# Altium PCB PCB3.PcbDoc
Units mil, origin at the board's own origin, x right, y up, seen from the top; angles counter-clockwise.
Board outline 5985.03 x 3125.03 mil, 2 copper layers (Top Layer, Bottom Layer); 86 components, 57 nets, 223 pads, 13 vias.
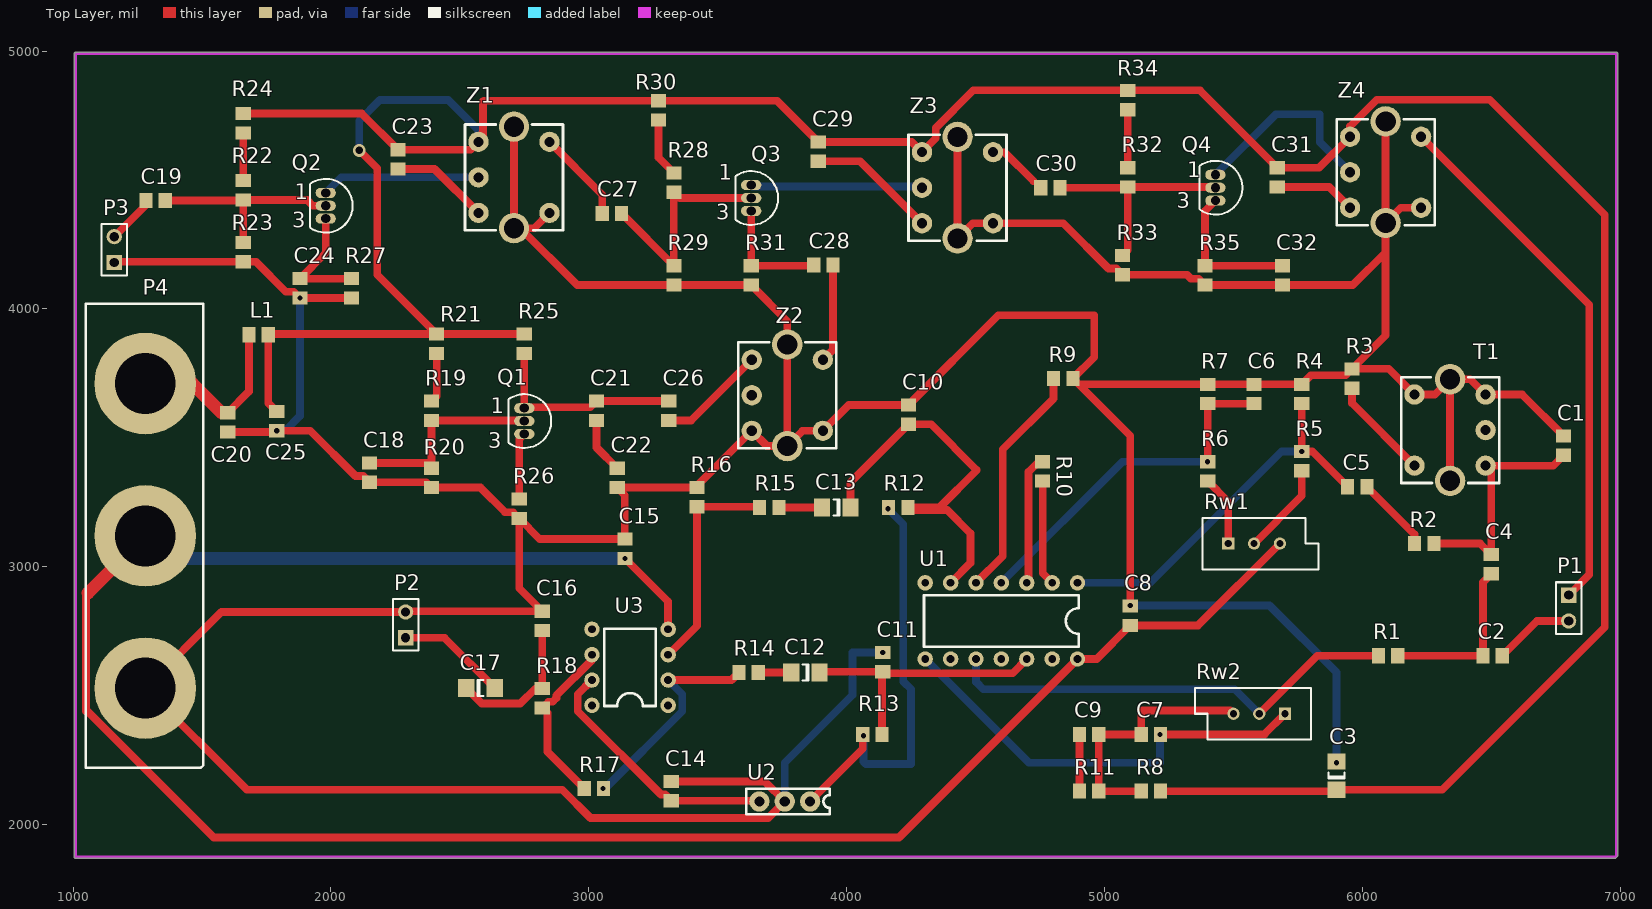
[diagram p0: Top Layer view]
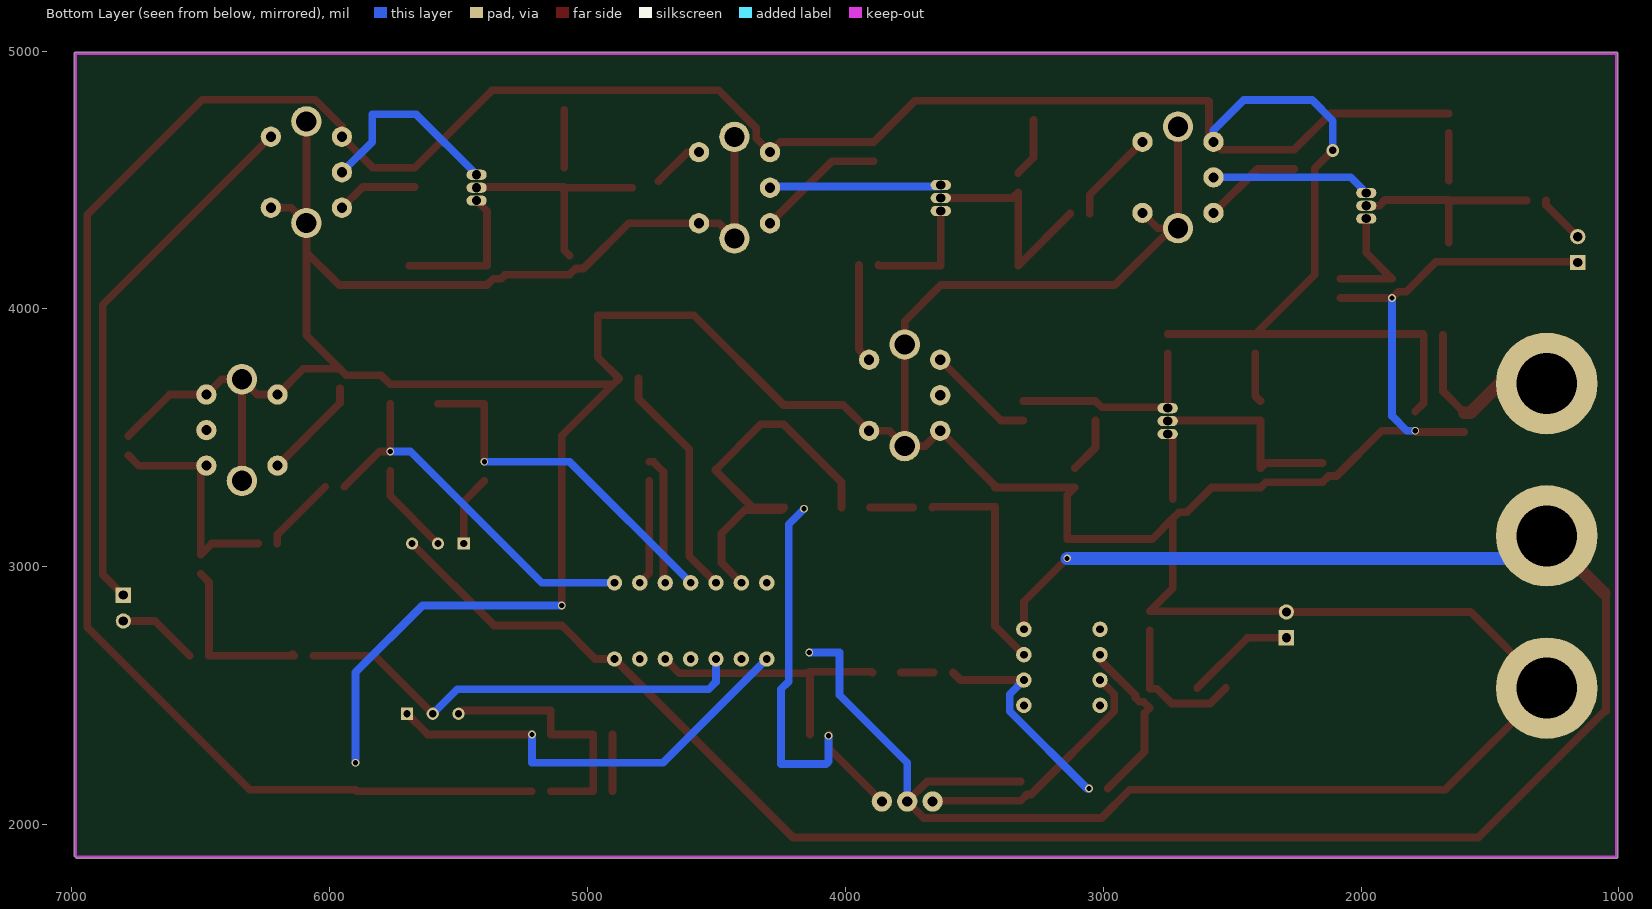
[diagram p1: Bottom Layer view, seen from below]

## Layer stack, top to bottom
Top Layer: signal copper 1.4
Dielectric: dielectric 12.6, FR-4, Dk 4.8
Bottom Layer: signal copper 1.4

## Board outline
1010,1869.98 cw(c1010,1875) 1004.99,1875 1004.99,4990 cw(c1010,4990) 1010,4995.02 6985,4995.02 cw(c6985,4990) 6990.02,4990 6990.02,1880 cw(c6985,1880) 6988.53,1876.44 6988.55,1876.45 6983.55,1871.45 6983.56,1871.47 cw(c6980,1875) 6980,1869.98

## Design rules (kind name [scope] priority, off if disabled: settings)
Clearance [All] p1: gap=10
HoleSize [All] p1: absolutevalues=TRUE maxlimit=1000 minlimit=1 maxpercent=80.000 minpercent=20.000
HoleToHoleClearance [All] p1: gap=1 allowstackedmicrovias=TRUE
MinimumSolderMaskSliver [All] p1: minsoldermaskwidth=1
PolygonConnect [All] p1: connectstyle=Relief reliefconductorwidth=10 reliefentries=4 polygonreliefangle="90 Angle"
RoutingVias [All] p1: holewidth=28 width=50 viastyle="Through Hole" minholewidth=28 minwidth=50 maxholewidth=28 maxwidth=50
SilkscreenOverComponentPads [All] p1: minsilkscreentomaskgap=10
SolderMaskExpansion [All] p1: expansion=4
TestPointUsage [All] p1: valid=0 allowmultiple=FALSE
Testpoint [All] p1: side=15 testpointundercomponent=TRUE minsize=40 maxsize=100 preferedsize=60 minholesize=0 maxholesize=40 preferedholesize=32 testpointgrid=1 style=1023 order=0-112345678
Width [All] p1: maxlimit=100 minlimit=10 preferedwidth=10 toplayer_prefwidth=50 bottomlayer_prefwidth=50 minimp=50.000000 maximp=50.000000 favimp=50.000000
20 further rules are at their usual default settings.

## Classes and differential pairs
component class Sheet1: C1 C2 C3 C4 C5 C6 C7 C8 C9 C10 C11 C12 C13 C14 C15 C16 C17 P1 P2 R1 R2 R3 R4 R5 R6 R7 R8 R9 R10 R11 R12 R13 R14 R15 R16 R17 R18 Rw1 Rw2 T1 U1 U2 U3
component class Sheet2: C18 C19 C20 C21 C22 C23 C24 C25 C26 C27 C28 C29 C30 C31 C32 L1 P3 P4 Q1 Q2 Q3 Q4 R19 R20 R21 R22 R23 R24 R25 R26 R27 R28 R29 R30 R31 R32 R33 R34 R35 Z1 Z2 Z3 Z4

## Components (designator, comment, footprint, x,y, rotation, side; value= is the part's Value field where it differs from the comment)
C1 "Cap" 2012[0805] 6780,3470 r270 top
C2 "Cap" 2012[0805] 6505,2655 r180 top
C3 "Cap Pol1" C1206 5900,2190 r90 top
C4 "Cap" 2012[0805] 6500,3010 r270 top
C5 "Cap" 2012[0805] 5980,3310 r180 top
C6 "Cap" 2012[0805] 5580,3670 r270 top
C7 "Cap" 2012[0805] 5180,2350 r180 top
C8 "Cap" 2012[0805] 5100,2810 r270 top
C9 "Cap" 2012[0805] 4940,2350 r180 top
C10 "Cap" 2012[0805] 4240,3590 r270 top
C11 "Cap" 2012[0805] 4140,2630 r270 top
C12 "Cap Pol1" C1206 3840,2590 r180 top
C13 "Cap Pol1" C1206 3960,3230 r180 top
C14 "Cap" 2012[0805] 3320,2130 r270 top
C15 "Cap" 2012[0805] 3140,3070 r270 top
C16 "Cap" 2012[0805] 2820,2790 r270 top
C17 "Cap Pol1" C1206 2580,2530 r0 top
C18 "Cap" 2012[0805] 2150,3365 r270 top
C19 "Cap" 2012[0805] 1320,4420 r0 top
C20 "Cap" 2012[0805] 1600,3560 r90 top
C21 "Cap" 2012[0805] 3030,3605 r270 top
C22 "Cap" 2012[0805] 3110,3345 r270 top
C23 "Cap" 2012[0805] 2260,4580 r270 top
C24 "Cap" 2012[0805] 1880,4080 r90 top
C25 "Cap" 2012[0805] 1790,3565 r90 top
C26 "Cap" 2012[0805] 3310,3605 r90 top
C27 "Cap" 2012[0805] 3090,4370 r0 top
C28 "Cap" 2012[0805] 3910,4170 r0 top
C29 "Cap" 2012[0805] 3890,4610 r270 top
C30 "Cap" 2012[0805] 4790,4470 r0 top
C31 "Cap" 2012[0805] 5670,4510 r270 top
C32 "Cap" 2012[0805] 5690,4130 r90 top
L1 "Inductor" 2012[0805] 1720,3900 r0 top
P1 "Header 2" HDR1X2 6800,2890 r270 top
P2 "Header 2" HDR1X2 2290,2725 r90 top
P3 "Header 2" HDR1X2 1160,4180 r90 top
P4 "Header 3" shuru 1280,3120 r90 top
Q1 "NPN" TO-226 2750,3565 r180 top
Q2 "NPN" TO-226 1980,4400 r180 top
Q3 "NPN" TO-226 3630,4430 r180 top
Q4 "NPN" TO-226 5430,4470 r180 top
R1 "Res1" 2012[0805] 6100,2655 r180 top
R2 "Res1" 2012[0805] 6240,3090 r180 top
R3 "Res1" 2012[0805] 5960,3730 r270 top
R4 "Res1" 2012[0805] 5765,3670 r270 top
R5 "Res1" 2012[0805] 5765,3410 r270 top
R6 "Res1" 2012[0805] 5400,3370 r270 top
R7 "Res1" 2012[0805] 5400,3670 r270 top
R8 "Res1" 2012[0805] 5180,2130 r180 top
R9 "Res1" 2012[0805] 4840,3730 r180 top
R10 "Res1" 2012[0805] 4760,3370 r270 top
R11 "Res1" 2012[0805] 4940,2130 r180 top
R12 "Res1" 2012[0805] 4200,3230 r180 top
R13 "Res1" 2012[0805] 4100,2350 r180 top
R14 "Res1" 2012[0805] 3620,2590 r180 top
R15 "Res1" 2012[0805] 3700,3230 r180 top
R16 "Res1" 2012[0805] 3420,3270 r270 top
R17 "Res1" 2012[0805] 3020,2140 r180 top
R18 "Res1" 2012[0805] 2820,2490 r270 top
R19 "Res1" 2012[0805] 2390,3605 r90 top
R20 "Res1" 2012[0805] 2390,3345 r90 top
R21 "Res Adj1" 2012[0805] 2410,3865 r270 top
R22 "Res1" 2012[0805] 1660,4460 r90 top
R23 "Res1" 2012[0805] 1660,4220 r90 top
R24 "Res Adj1" 2012[0805] 1660,4720 r270 top
R25 "Res1" 2012[0805] 2750,3865 r90 top
R26 "Res1" 2012[0805] 2730,3225 r90 top
R27 "Res1" 2012[0805] 2080,4080 r90 top
R28 "Res1" 2012[0805] 3330,4490 r90 top
R29 "Res1" 2012[0805] 3330,4130 r90 top
R30 "Res Adj1" 2012[0805] 3270,4770 r270 top
R31 "Res1" 2012[0805] 3630,4130 r90 top
R32 "Res1" 2012[0805] 5090,4510 r90 top
R33 "Res1" 2012[0805] 5070,4170 r90 top
R34 "Res Adj1" 2012[0805] 5090,4810 r270 top
R35 "Res1" 2012[0805] 5390,4130 r90 top
Rw1 "RPot" VR5 5580,3090 r0 top
Rw2 "RPot" VR5 5600,2430 r180 top
T1 "zhongzhou" ZHONGZHOU 6340,3530 r180 top
U1 "MC1496" MC1496 4600,2790 r180 top
U2 "LM7808" LM7808 3760,2090 r180 top
U3 "LM741" LM741 3160,2610 r180 top
Z1 "zhongzhou1" ZHONGZHOU 2710,4510 r0 top
Z2 "zhongzhou2" ZHONGZHOU 3770,3665 r0 top
Z3 "zhongzhou3" ZHONGZHOU 4430,4470 r0 top
Z4 "zhongzhou4" ZHONGZHOU 6090,4530 r0 top

## Footprints (in the part's own frame and the unit in brackets; to place one, negate y for a bottom-side part, rotate by r counter-clockwise, add the part's x,y. Pads: shape width x height; smd on the part's side, far side on the other; paste and mask are expansions set on the pad)
2012[0805] [mm] "Chip Resistor; Body 2.0 x 1.3 mm (LxW typ)"
  rect 1.3x1.5 smd: 1(-0.95,0) 2(0.95,0)
C1206 [mm] "Chip Capacitor; Body 3.2 x 1.6 mm (LxW typ)"
  rect 1.6x1.8 smd: 1(-1.4,0) 2(1.4,0)
  silkscreen extent -0.3,-0.8 0.3,0.8
HDR1X2 [mm] "Connector; Header; 2 Position"
  rect 1.5x1.5 hole 0.9: 1(0,0)
  round 1.5 hole 0.9: 2(2.54,0)
  silkscreen extent -1.27,-1.27 3.81,1.27
LM741 [mil]
  round 60 hole 30: 1(-147.64,147.64) 2(-147.64,49.21) 3(-147.64,-49.21) 4(-147.64,-147.64) 5(147.64,-147.64) 6(147.64,-49.21) 7(147.64,49.21) 8(147.64,147.64)
  silkscreen extent -100,-150 100,150
LM7808 [mm]
  round 2 hole 1: 1(-2.5,0) 2(0,0) 3(2.5,0)
  silkscreen extent -4.44,-1.27 3.81,1.27
MC1496 [mil]
  round 60 hole 30: 1(-295.28,-147.64) 2(-196.85,-147.64) 3(-98.43,-147.64) 4(0,-147.64) 5(98.43,-147.64) 6(196.85,-147.64) 7(295.28,-147.64) 8(295.28,147.64) 9(196.85,147.64) 10(98.43,147.64) 11(0,147.64) 12(-98.43,147.64) 13(-196.85,147.64) 14(-295.28,147.64)
  silkscreen extent -300,-100 300,100
shuru [mm]
  round 10 hole 6: 1(-15,0) 2(0,0) 3(15,0)
  silkscreen extent -22.86,-5.72 22.86,5.84
TO-226 [mm] "TO, Flat Index; 3 In-Line, Axial Leads; Body Dia. 4.8mm; Leads 0.55 x 0.51 mm (max)"
  oval 2x1 hole 0.9: 1(0,-1.27) 2(0,0) 3(0,1.27)
  silkscreen extent -2.65,-2.65 1.55,2.65
VR5 [mm] "Potentiometer; 3 Leads"
  rect 1.2x1.2 hole 0.7: 1(-2.54,0)
  round 1.2 hole 0.7: 2(0,0) 3(2.54,0)
  silkscreen extent -5.08,-2.54 6.35,2.54
ZHONGZHOU [mm]
  round 2 hole 1: 1(-3.5,3.5) 2(-3.5,0) 3(-3.5,-3.5) 4(3.5,-3.5) 5(3.5,3.5)
  round 3 hole 2: 6(0,5) 7(0,-5)
  silkscreen extent -4.83,-5.21 4.83,5.21

## Part data
C1 C2 C4 C5 C6 C7 C8 C9 C10 C11 C14 C15 C16 C18 C19 C20 C21 C22 C23 C24 C25 C26 C27 C28 C29 C30 C31 C32: "Capacitor"
C3 C12 C13 C17: "Polarized Capacitor (Radial)"
P1 P2 P3: "Header, 2-Pin"
P4: "Header, 3-Pin"
Q1 Q2 Q3 Q4: "NPN Bipolar Transistor"
R1 R2 R3 R4 R5 R6 R7 R8 R9 R10 R11 R12 R13 R14 R15 R16 R17 R18 R19 R20 R22 R23 R25 R26 R27 R28 R29 R31 R32 R33 R35: "Resistor"
R21 R24 R30 R34: "Variable Resistor"
Rw1 Rw2: "Potentiometer"
Z2: library part zhongzhou4
Z3: library part zhongzhou2
Z4: library part zhongzhou3

## Via types
v1: diameter 30, hole 20, Top Layer to Bottom Layer, 12 vias
v2: diameter 50, hole 28, Top Layer to Bottom Layer, 1 vias

## Nets (pads, with @x,y where several pads share a name; then routed paths per layer and width w, separated by ;. In a path a pad name is that pad's centre, name@x,y a point inside that pad or via, vN(x,y) a via of type N, cw(c..) or ccw(c..) an arc to the next point about the centre after c; other vN are vias at no path point)
+12V: C3.1 C23.1 C25.2 C29.1 C31.1 L1.2 R8.1 R21.1 R24.1 R25.2 R30.1 R34.1 Z1.1 Z3.1 Z4.1 | length 12576.5
  Top Layer w30: R24.1 2120,4757.4 C23.1 2541.81,4617.4 Z1.1 2590,4665.59 2590,4805 2592.4,4807.4 3730,4807.4 C29.1 4252.6,4647.4 Z3.1 4345.94,4661.54 4345.94,4701.67 4491.68,4847.4 R34.1 5370,4847.4 C31.1 5831.81,4547.4 Z4.1 5952.2,4707.93 6055.18,4810.91 6494.09,4810.91 6940,4365 6940,2765 6309.88,2134.88 C3.1 5895.12,2130 R8.1 ; C25.2 1757.4,3635 L1.2 1759.8,3902.4 R21.1 ; v2(2110,4615) 2180,4545 2180,4132.4 R21.1 ; R25.2 R21.1
  Bottom Layer w30: v2(2110,4615) 2110,4730 2190,4810 2455,4810 2572.2,4692.8 Z1.1
-8V: C8.2 C15.2 P4.2 Rw1.3 U1.14 U3.4 | length 8310.9
  Top Layer w30: 1050,2439.41 1050,2900 ; 1058.15,2437.55 1545.7,1950 4202.91,1950 U1.14 4969.76,2642.36 C8.2 5362.6,2772.6 Rw1.3 ; v1(3140,3032.6) 3307.64,2864.96 U3.4
  Top Layer w50: 1058.15,2898.15 P4.2
  Bottom Layer w30: P4.2 P4.2@1367.4,3032.6
  Bottom Layer w50: P4.2@1367.4,3032.6 v1(3140,3032.6)
GND: C1.1 C3.2 C6.1 C8.1 C10.1 C11.1 C14.1 C15.1 C16.1 C18.2 C20.1 C22.2 C24.1 C25.1 C32.1 P2.2 P3.1 P4.1 R3.1 R4.1 R7.1 R9.1 R16.1 R20.1 R23.1 R26.1 R27.1 R29.1 R31.1 R33.1 R35.1 T1.3 T1.4 T1.6 T1.7 U2.2 Z1.4 Z1.6 Z1.7 Z2.3 Z2.4 Z2.6 Z2.7 Z3.4 Z3.6 Z3.7 Z4.4 Z4.6 Z4.7 | length 22308
  Top Layer w30: P3.1 1162.6,4182.6 R23.1 1709.69,4182.6 1825.47,4066.81 1855.79,4066.81 v1(1880,4042.6) R27.1 ; C20.1 1785,3522.6 v1(1790,3527.6) 1919.69,3527.6 2095.47,3351.81 2125.79,3351.81 C18.2 2370,3327.6 R20.1 2579.69,3307.6 2675.47,3211.81 2705.79,3211.81 R26.1 ; Z1.6 Z1.7 Z1.7@2735,4313.15 ; Z1.4 2788.74,4313.15 Z1.7@2735,4313.15 ; C14.1 3682.6,2167.4 U2.2 3695.63,2025.63 3006.49,2025.63 2897.12,2135 1674.45,2135 P4.1 1575.55,2825 P2.2 2292.4,2827.4 C16.1 2730,2917.4 R26.1 ; Z3.6 Z3.7 4489.05,4332.2 Z3.4 4840.08,4332.2 5015.47,4156.81 5045.79,4156.81 R33.1 5319.69,4132.6 5335.47,4116.81 5365.79,4116.81 R35.1 C32.1 5962.6,4092.6 6090,4220 ; C8.1 5100,3507.4 R9.1@4900,3707.4 ; Z4.6 Z4.7 ; Z4.4 6149.05,4392.2 Z4.7 ; T1.6 T1.7 ; C1.1 6619.61,3667.8 T1.3 6418.74,3726.85 T1.7 ; R26.1 2810.2,3107.4 C15.1 3140,3277.6 3110.2,3307.4 R16.1 3420,3315 Z2.3 3691.26,3468.15 Z2.7 ; Z1.7@2735,4313.15 2955.55,4092.6 R29.1 R31.1 3770,3952.6 Z2.6 Z2.7 ; Z2.7 3829.05,3527.2 Z2.4 4007.99,3627.4 C10.1 4587.6,3975 4960,3975 4960,3812.6 R9.1 R9.1@4900,3707.4 ; R9.1@4900,3707.4 R7.1 C6.1 R4.1 5800.79,3743.19 5935.79,3743.19 R3.1 ; R3.1 6090,3897.4 6090,4220 ; R3.1 6102.6,3767.4 T1.4 6280.95,3667.8 T1.7 ; 6090,4220 Z4.7
  Bottom Layer w30: v1(1790,3527.6) 1822.6,3527.6 1880,3585 v1(1880,4042.6) ; U2.2 3760,2240 4022.4,2502.4 4022.4,2667.4 v1(4140,2667.4) ; v1(5100,2850) 5640,2850 5900,2590 v1(5900,2240)
NetC1_2: C1.2 C4.1 R2.1 T1.1 | length 913.2
  Top Layer w30: R2.1 6457.4,3090 C4.1 6500,3370 T1.1 6739.61,3392.2 C1.2
NetC2_1: C2.1 P1.2 | length 313.5
  Top Layer w30: C2.1 6677.4,2790 P1.2
NetC2_2: C2.2 C4.2 R1.1 | length 665.9
  Top Layer w30: R1.1 6142.4,2660 R1.1@6145,2660 ; R1.1@6142.4,2655 C2.2 6467.6,2940.2 C4.2
NetC5_1: C5.1 R2.2 | length 296.7
  Top Layer w30: C5.1 6202.6,3124.8 R2.2
NetC5_2: C5.2 R4.2 R5.1 U1.1 | length 1500.6
  Top Layer w30: R4.2 v1(5765,3447.4) 5805.2,3447.4 C5.2
  Bottom Layer w30: U1.1 5177.64,2937.64 5687.4,3447.4 v1(5765,3447.4)
NetC6_2: C6.2 R6.1 R7.2 U1.4 | length 1399.8
  Top Layer w30: v1(5400,3407.4) R7.2 C6.2
  Bottom Layer w30: U1.4 5069.76,3407.4 v1(5400,3407.4)
NetC7_1: C7.1 Rw2.1 U1.8 | length 1702.7
  Top Layer w30: C7.1 5620,2350 Rw2.1
  Bottom Layer w30: U1.8 4707.09,2240 5215,2240 v1(5215,2350)
NetC7_2: C7.2 C9.1 R8.2 R11.1 Rw2.3 | length 1005.3
  Top Layer w30: R8.2 R11.1 C9.1 C7.2 5142.6,2442.4 5487.6,2442.4 Rw2.3
NetC9_2: C9.2 R11.2 | length 220
  Top Layer w30: R11.2 C9.2
NetC10_2: C10.2 C13.1 R12.1 U1.6 | length 1590.2
  Top Layer w30: C13.1 4015.12,3327.72 C10.2 4327.4,3552.6 4505,3375 4360,3230 R12.1 4247.4,3220 4390,3220 4480,3130 4480,3014.49 U1.6
NetC11_2: C11.2 C12.1 R13.1 U1.12 | length 1073
  Top Layer w30: C12.1 3897.72,2592.6 C11.2 ; R13.1 4137.4,2590 C11.2 ; U1.12 4643.43,2587.36 4145.24,2587.36 C11.2
NetC12_2: C12.2 R14.1 | length 127.5
  Top Layer w30: R14.1 C12.2
NetC13_2: C13.2 R15.1 | length 167.5
  Top Layer w30: R15.1 C13.2
NetC14_2: C14.2 U2.3 U3.7 | length 993
  Top Layer w30: U3.7 2957.36,2505.79 2957.36,2439.57 3280.12,2116.81 3295.79,2116.81 C14.2 3658.98,2092.6 U2.3
NetC16_2: C16.2 C17.1 R18.1 | length 569.3
  Top Layer w30: C17.1 2585.32,2469.57 2734.57,2469.57 2792.4,2527.4 R18.1 C16.2
NetC17_2: C17.2 P2.1 | length 425.9
  Top Layer w30: P2.1 2440.12,2725 C17.2
NetC18_1: C18.1 Q1.2 R19.1 R20.2 | length 794.6
  Top Layer w30: C18.1 2370,3402.4 R20.2 R19.1 2747.4,3567.6 Q1.2
NetC19_1: C19.1 P3.2 | length 208.2
  Top Layer w10: P3.2 P3.2@1160,4297.4
  Top Layer w30: P3.2 1282.6,4402.6 C19.1
NetC19_2: C19.2 Q2.2 R22.1 R23.2 | length 798.2
  Top Layer w30: C19.2 1657.4,4420 R22.1 ; R23.2 R22.1 ; Q2.2 1929.84,4400 1907.24,4422.6 R22.1
NetC20_2: C20.2 L1.1 P4.3 | length 863.7
  Top Layer w30: C20.2 1682.6,3680 L1.1
  Top Layer w50: P4.3@1393.15,3597.4 P4.3 1462.64,3710.55 1575.79,3597.4 C20.2
NetC21_1: C21.1 C26.2 Q1.1 R25.1 | length 783.9
  Top Layer w30: R25.1 Q1.1 2753.19,3618.19 3005.79,3618.19 C21.1 C26.2
NetC21_2: C21.2 C22.1 | length 218.3
  Top Layer w30: C21.2 3030,3462.4 C22.1
NetC23_2: C23.2 Z1.3 | length 382.8
  Top Layer w30: C23.2 2401.81,4542.6 Z1.3
NetC24_2: C24.2 Q2.3 R27.2 | length 474
  Top Layer w30: Q2.3 1980,4217.4 C24.2 R27.2
NetC26_1: C26.1 Z2.1 | length 419.6
  Top Layer w30: C26.1 3397.01,3567.6 Z2.1
NetC27_1: C27.1 Z1.5 | length 362.6
  Top Layer w30: Z1.5 3052.6,4442.99 C27.1
NetC27_2: C27.2 Q3.2 R28.1 R29.2 | length 881.1
  Top Layer w30: C27.2 R29.2 R28.1 3352.6,4430 Q3.2
NetC28_1: C28.1 Q3.3 R31.2 | length 456.3
  Top Layer w30: Q3.3 R31.2 3870,4167.4 C28.1
NetC28_2: C28.2 Z2.5 | length 383.6
  Top Layer w30: Z2.5 3947.4,3842.4 C28.2
NetC29_2: C29.2 Z3.3 | length 501.8
  Top Layer w30: C29.2 4051.81,4572.6 Z3.3
NetC30_1: C30.1 Z3.5 | length 203.9
  Top Layer w30: Z3.5 4612.2,4607.8 4725,4495
NetC30_2: C30.2 Q4.2 R32.1 R33.2 | length 878.2
  Top Layer w30: C30.2 5087.4,4470 R32.1 ; R33.2 5090,4227.4 R32.1 ; Q4.2 5427.4,4472.6 R32.1
NetC31_2: C31.2 Z4.3 | length 315.5
  Top Layer w30: C31.2 5871.81,4472.6 Z4.3
NetC32_2: C32.2 Q4.3 R35.2 | length 569.2
  Top Layer w30: Q4.3 5390,4380 R35.2 C32.2
NetQ1_3: Q1.3 R26.2 | length 260.9
  Top Layer w30: R26.2 2730,3495 Q1.3
NetQ2_1: Q2.1 Z1.2 | length 617.1
  Bottom Layer w30: Q2.1 2040,4510 Z1.2
NetQ3_1: Q3.1 Z3.2 | length 666.3
  Bottom Layer w30: Q3.1 3635.32,4474.69 4287.52,4474.69 Z3.2
NetQ4_1: Q4.1 Z4.2 | length 775.9
  Bottom Layer w30: Q4.1 5665,4755 5835,4755 5835,4647.2 Z4.2
NetR1_2: R1.2 Rw2.2 U1.10 | length 1794.3
  Top Layer w30: Rw2.2 5825,2655 R1.2
  Bottom Layer w30: U1.10 4501.57,2553.43 4530,2525 5505,2525 Rw2.2
NetR3_2: R3.2 T1.5 | length 400.7
  Top Layer w30: R3.2 5960,3634.41 T1.5
NetR5_2: R5.2 Rw1.2 | length 359.2
  Top Layer w30: Rw1.2 5765,3275 R5.2
NetR6_2: R6.2 Rw1.1 | length 275.7
  Top Layer w30: R6.2 5480,3252.6 Rw1.1
NetR9_2: R9.2 U1.5 | length 917.1
  Top Layer w30: U1.5 4605,3041.06 4605,3455 4802.6,3652.6 R9.2
NetR10_1: R10.1 U1.3 | length 504.4
  Top Layer w30: U1.3 4705.47,2944.68 4705.47,3368.54 4744.33,3407.4 R10.1
NetR10_2: R10.2 U1.2 | length 410.2
  Top Layer w30: R10.2 4760,2974.49 U1.2
NetR12_2: R12.2 R13.2 U2.1 | length 1661
  Top Layer w30: U2.1 4062.6,2294.17 R13.2
  Bottom Layer w30: v1(4065,2345) 4065,2245 4075,2235 4250,2235 4250,2525 4220,2555 4220,3165 v1(4160,3225)
NetR14_2: R14.2 R17.1 U3.2 | length 862.8
  Top Layer w30: U3.2 3553.39,2560.79 R14.2
  Bottom Layer w30: v1(3055,2140) 3063.06,2140 3362.64,2439.58 3362.64,2505.79 U3.2
NetR15_2: R15.2 R16.2 U3.3 | length 863.6
  Top Layer w30: U3.3 3420,2771.57 R16.2 3660,3232.6 R15.2
NetR17_2: R17.2 R18.2 U3.6 | length 675.4
  Top Layer w30: R17.2 2840,2282.6 2840,2432.6 R18.2 2844.21,2476.81 2859.88,2476.81 2874.53,2491.46 2874.53,2500.74 3012.36,2638.57 U3.6
NetR19_2: R19.2 R21.2 | length 193.5
  Top Layer w30: R19.2 2410,3662.4 R21.2
NetR22_2: R22.2 R24.2 | length 185.2
  Top Layer w30: R22.2 R24.2
NetR28_2: R28.2 R30.2 | length 230
  Top Layer w30: R30.2 3270,4587.4 R28.2
NetR32_2: R32.2 R34.2 | length 225.2
  Top Layer w30: R32.2 R34.2
ZHONGFANG: P1.1 Z4.5 | length 2081.1
  Top Layer w30: Z4.5 6880,4015.59 6880,2970 P1.1
pads on no net: T1.2 U1.7 U1.9 U1.11 U1.13 U3.1 U3.5 U3.8 Z2.2

## Keep-outs
Keep-Out Layer:
  lines w10: 1010,1875 6980,1875 6985,1880 6985,4990 1010,4990 1010,1875

## Text inside footprints (layer, text, board x,y; h text height)
Q1: Top Overlay "1" at 2620,3595 h59.05; Top Overlay "3" at 2610,3460 h59.05
Q2: Top Overlay "3" at 1850,4315 h59.05; Top Overlay "1" at 1860,4425 h59.05
Q3: Top Overlay "3" at 3495,4345 h59.05; Top Overlay "1" at 3505,4500 h59.05
Q4: Top Overlay "3" at 5280,4390 h59.05; Top Overlay "1" at 5320,4510 h59.05